# Altium PCB Relay_Card_PCB.PcbDoc (part 2 of 2)
Units mil, origin at the board's own origin, x right, y up, seen from the top; angles counter-clockwise.
Board outline 5600 x 4000 mil, 4 copper layers (Top Layer, Plane(Gnd), Place(Power), Bottom Layer), stack 23.756 mil thick; 178 components, 161 nets, 460 pads, 120 vias.
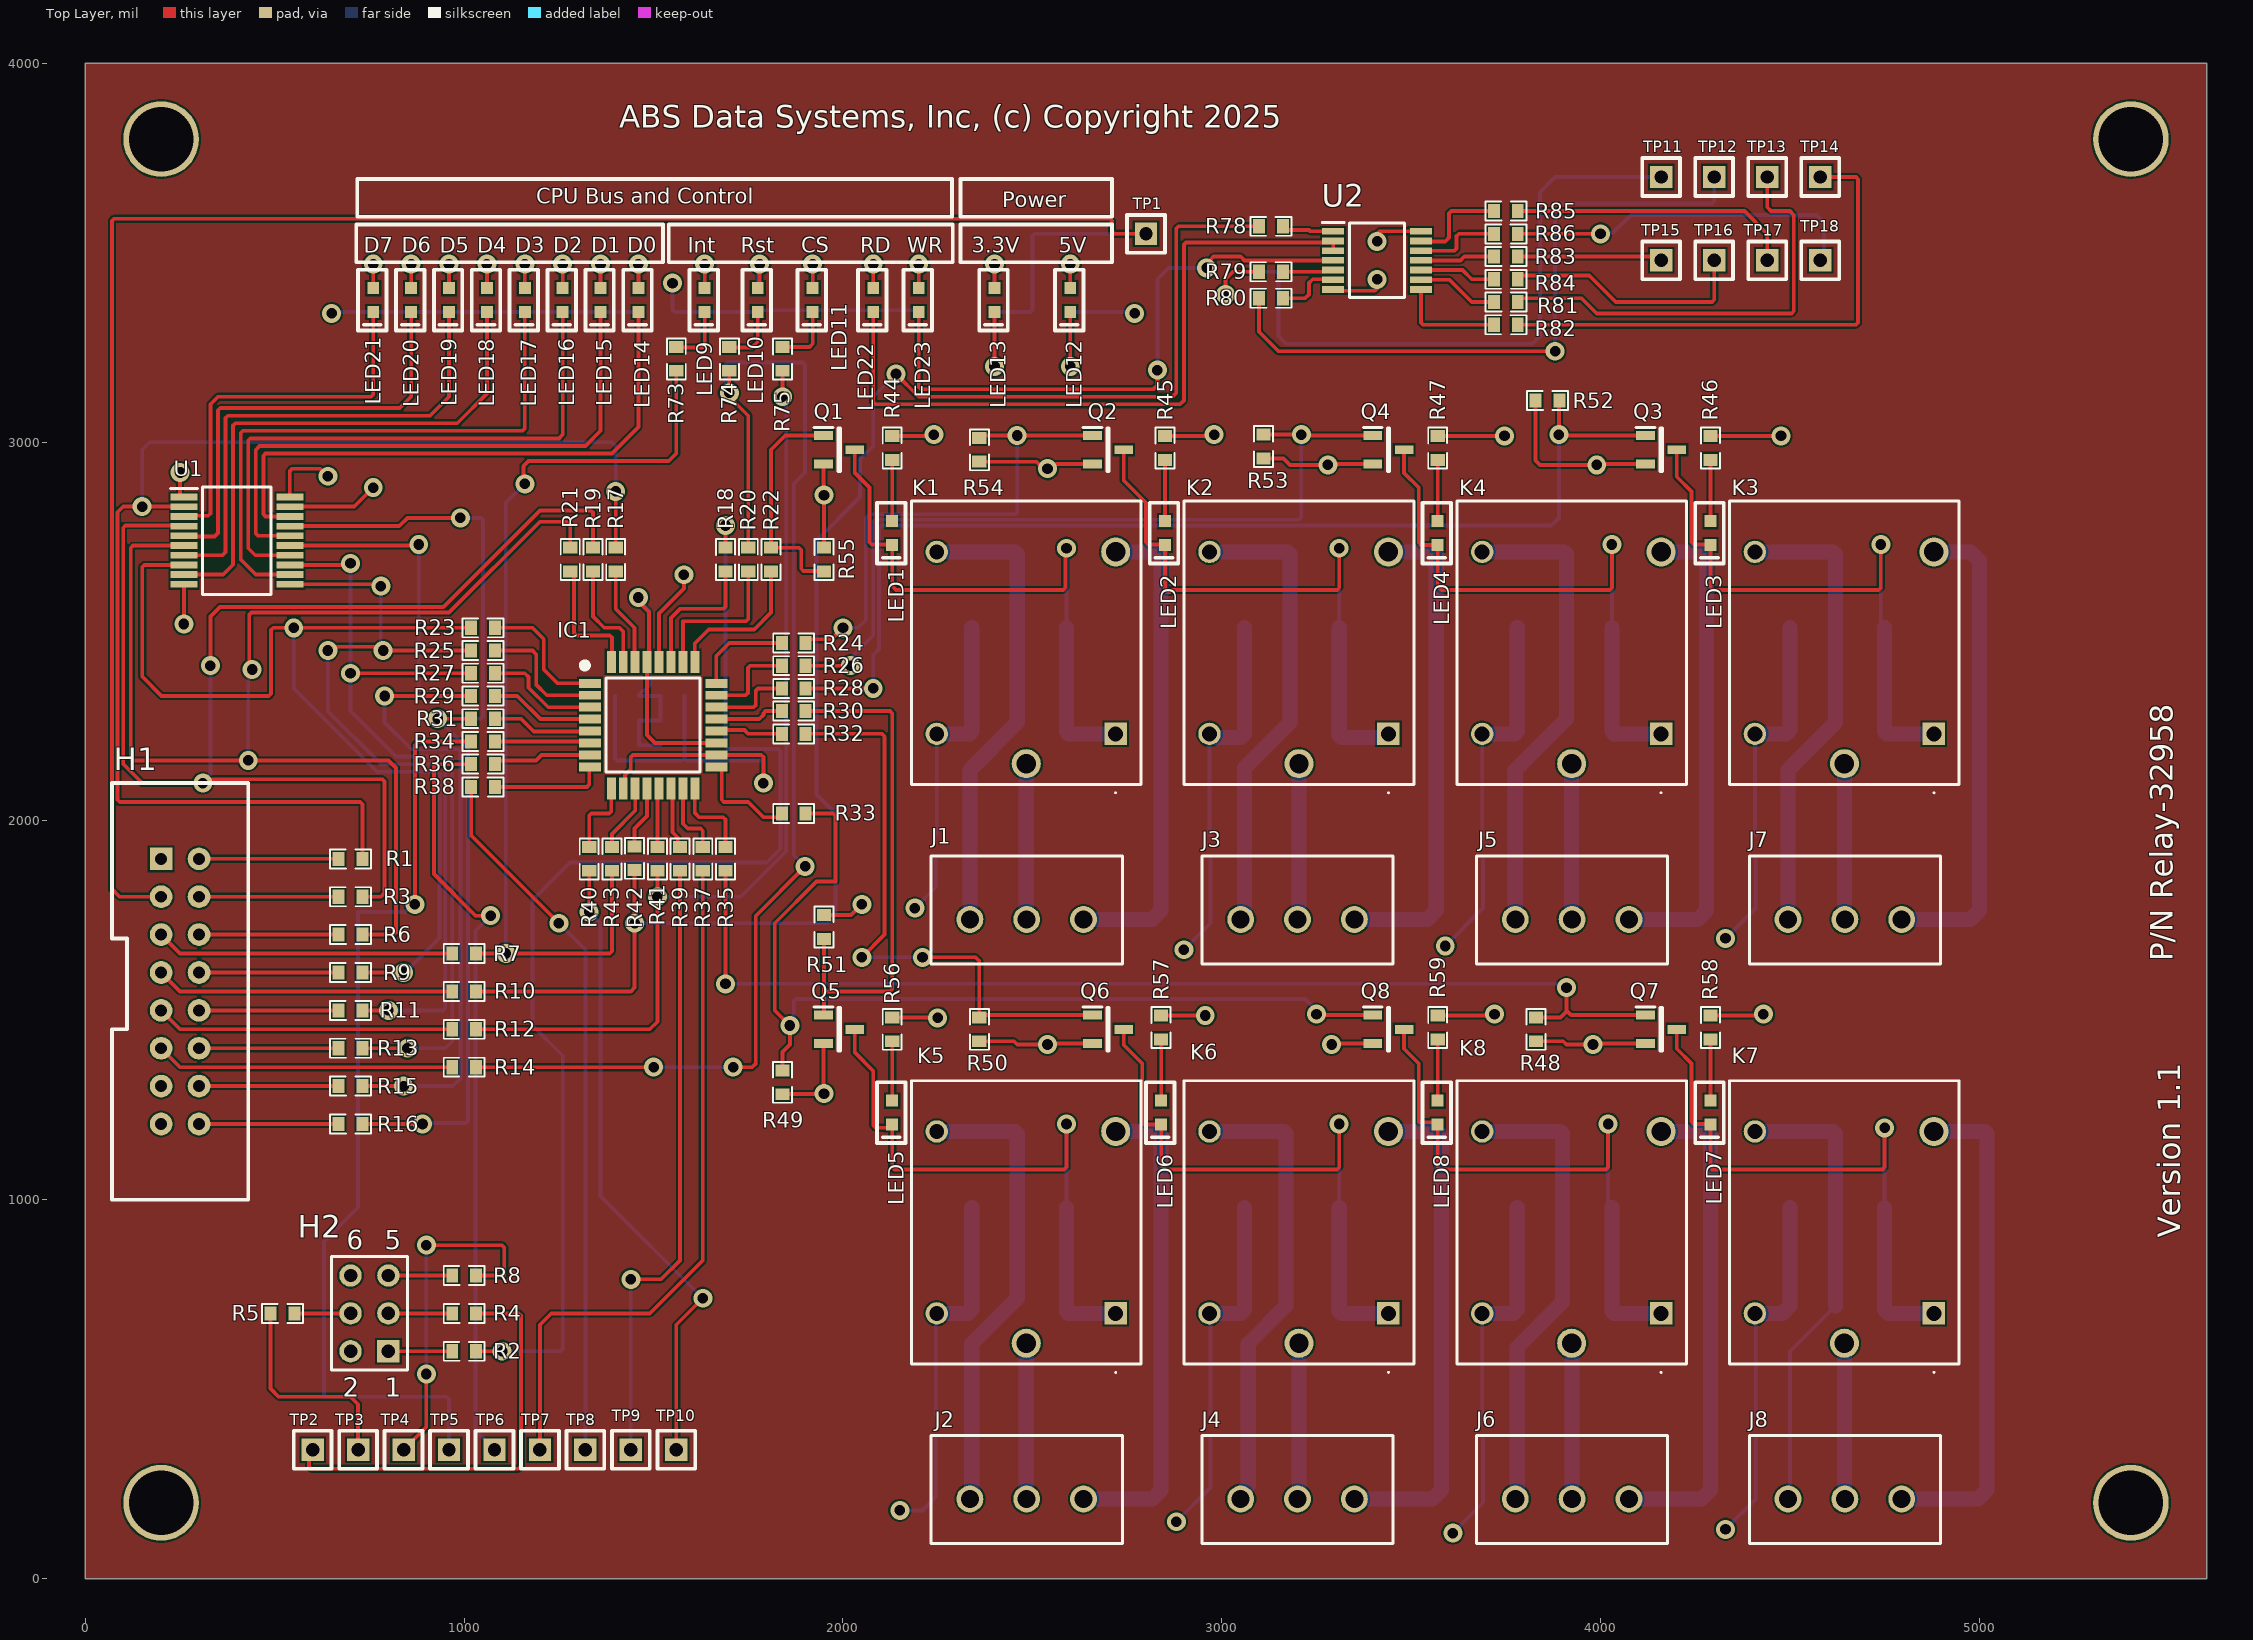
[diagram p0: Top Layer view]

## Via types
v1: diameter 50, hole 28, Top Layer to Bottom Layer, 120 vias

## Nets (pads, with @x,y where several pads share a name; then routed paths per layer and width w, separated by ;. In a path a pad name is that pad's centre, name@x,y a point inside that pad or via, vN(x,y) a via of type N, cw(c..) or ccw(c..) an arc to the next point about the centre after c; other vN are vias at no path point) (continued)
Relay_6_Com: (continued)
  Bottom Layer w10: J4.2@3200,200 J4.2@3203.78,203.78
  Bottom Layer w40: J4.2@3203.78,203.78 K6.4
Relay_6_N_Closed: J4.3 K6.5 | length 1219
  Bottom Layer w10: J4.3 J4.3@3050,226.29 ; 3164.14,1180.32 3170,1174.46
  Bottom Layer w40: K6.5 3164.14,1180.32 ; J4.3@3050,226.29 3070,246.29 3070,620 3170,720 3170,1174.46
Relay_6_N_Open: J4.1 K6.2 | length 1320.5
  Bottom Layer w40: J4.1 3556.57,210 3580,233.43 3580,1170 3569.68,1180.32 K6.2
Relay_7: Q8.1 R33.2 R49.1 | length 2506.8
  Top Layer w10: R49.1@1840,1331.5 1840,1390 1860,1410 v1(1860,1460) 1820,1500 1820,1730 1930,1840 1980,1840 1980,2014.14 1974.14,2020 R33.2 ; v1(3250,1490) 3252.4,1487.6 Q8.1
  Bottom Layer w10: v1(1860,1460) 1867.65,1467.65 1867.65,1483.51 1870,1485.86 1870,1524.14 1875.86,1530 3220,1530 3250,1500 v1(3250,1490)
Relay_7_Com: J6.2 K8.4 | length 410
  Bottom Layer w40: J6.2 K8.4@3925,620.04
Relay_7_N_Closed: J6.3 K8.5 | length 1243.5
  Bottom Layer w10: 3770,604.14 3775.86,610 3780,610
  Bottom Layer w40: K8.5 3894.14,1180.32 3900,1174.46 3900,730 3780,610 3780,215 J6.3
Relay_7_N_Open: J6.1 K8.2 | length 1298.2
  Bottom Layer w40: J6.1 4266.57,210 4290,233.43 4290,1174.46 4284.14,1180.32 K8.2
Relay_8: Q7.1 R35.2 R48.1 | length 2885.7
  Top Layer w10: v1(1690,1570) R35.2 ; R48.1 3894.14,1481.5 3910,1497.35 3910,1500 ; v1(3910,1560) 3910,1500 ; Q7.1 3922.4,1487.6 3910,1500
  Bottom Layer w10: v1(1690,1570) 3884.14,1570 3886.49,1567.65 3902.35,1567.65 v1(3910,1560)
Relay_8_Com: J8.2 K7.4 | length 410
  Bottom Layer w40: J8.2@4643.78,211.22 K7.4
Relay_8_N_Closed: J8.3 K7.5 | length 1231.1
  Bottom Layer w10: J8.3 4500,215 4500,600 4620,720
  Bottom Layer w40: K7.5 4614.14,1180.32 4620,1174.46 4620,720
Relay_8_N_Open: J8.1 K7.2 | length 1318.2
  Bottom Layer w40: J8.1 4996.57,210 5020,233.43 5020,1174.46 5014.14,1180.32 K7.2
UPDI: R2.1 R18.2 | length 3212.5
  Top Layer w10: R2.1 v1(1100,600) ; R18.2 v1(1690,2780)
  Bottom Layer w10: v1(1100,600) 1254.14,600 1260,605.86 1260,1380 1180,1460 1180,1794.14 1185.86,1800 1190,1800 1280,1890 1798.79,1890 1835,1926.21 1835,2184.14 1829.14,2190 1695.86,2190 1690,2195.86 v1(1690,2780)

## Polygon pours and split planes (outlines as drawn)
no net on Bottom Layer "NONET_L04_P000" (solid, pour order 0): 0,0 0,4000 5600,4000 5600,0
no net on Top Layer "NONET_L01_P001" (solid, pour order 1): 0,4000 5600,4000 5600,0 0,0
+5 on Place(Power) (split plane): 5579.9,20.1 20.1,20.1 20.1,3979.9 5579.9,3979.9
GND on Plane(Gnd) (split plane): 5579.9,20.1 20.1,20.1 20.1,3979.9 5579.9,3979.9

## Silkscreen, mask and mechanical layers (free items; w line width, h text height)
Top Overlay:
  lines w10: 715,3475 1525,3475 1525,3575 715,3575 715,3475 ; 717.5,3595 2287.5,3595 2287.5,3695 717.5,3695 717.5,3595 ; 1540,3475 2290,3475 2290,3575 1540,3575 1540,3475 ; 2310,3475 2710,3475 2710,3575 2310,3575 2310,3475 ; 2310,3595 2710,3595 2710,3695 2310,3695 2310,3595
  text "ABS Data Systems, Inc, (c) Copyright 2025" at 1410,3829.99 h60
  text "CPU Bus and Control" at 1190,3630 h40
  text "Power" at 2420,3620 h40
  text "D7" at 735,3500 h40
  text "D6" at 835,3500 h40
  text "D5" at 935,3500 h40
  text "D4" at 1035,3500 h40
  text "D3" at 1135,3500 h40
  text "D2" at 1235,3500 h40
  text "D1" at 1335,3500 h40
  text "D0" at 1430,3500 h40
  text "Int" at 1590,3500 h40
  text "Rst" at 1730,3500 h40
  text "CS" at 1890,3500 h40
  text "RD" at 2045,3500 h40
  text "WR" at 2170,3500 h40
  text "3.3V" at 2340,3500 h40
  text "5V" at 2570,3500 h40
  text "P/N Relay-32958" at 5510.01,1630 h60 r90
  text "Version 1.1" at 5530,900 h60 r90
Mechanical 1:
  the board outline again, w10

## Text inside footprints (layer, text, board x,y; h text height)
H2: Top Overlay "1" at 790,480 h50; Top Overlay "2" at 680,480 h50; Top Overlay "5" at 790,870 h50; Top Overlay "6" at 690,870 h50